# Altium PCB UWB-NODEV1.PcbDoc
Units mil, origin at the board's own origin, x right, y up, seen from the top; angles counter-clockwise.
Board outline 1660 x 2519.68 mil, 2 copper layers (Top Layer, Bottom Layer); 46 components, 62 nets, 194 pads, 22 vias.
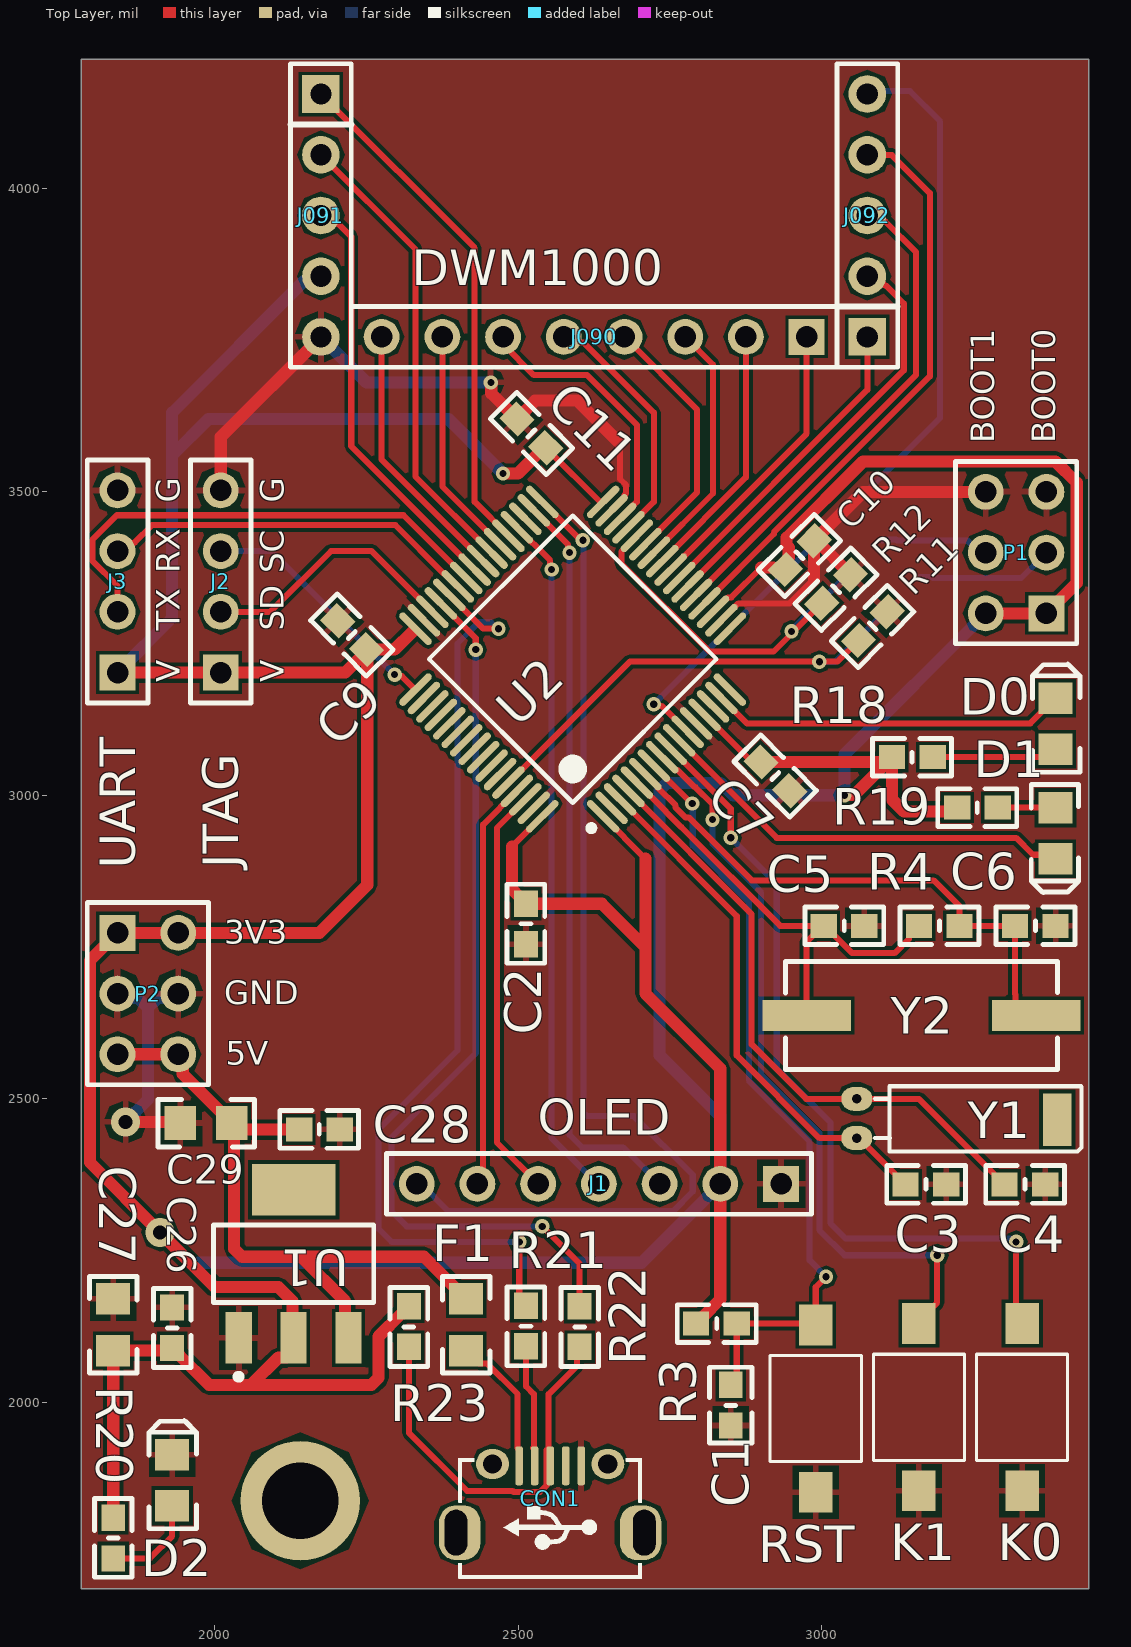
[diagram p0: Top Layer view]
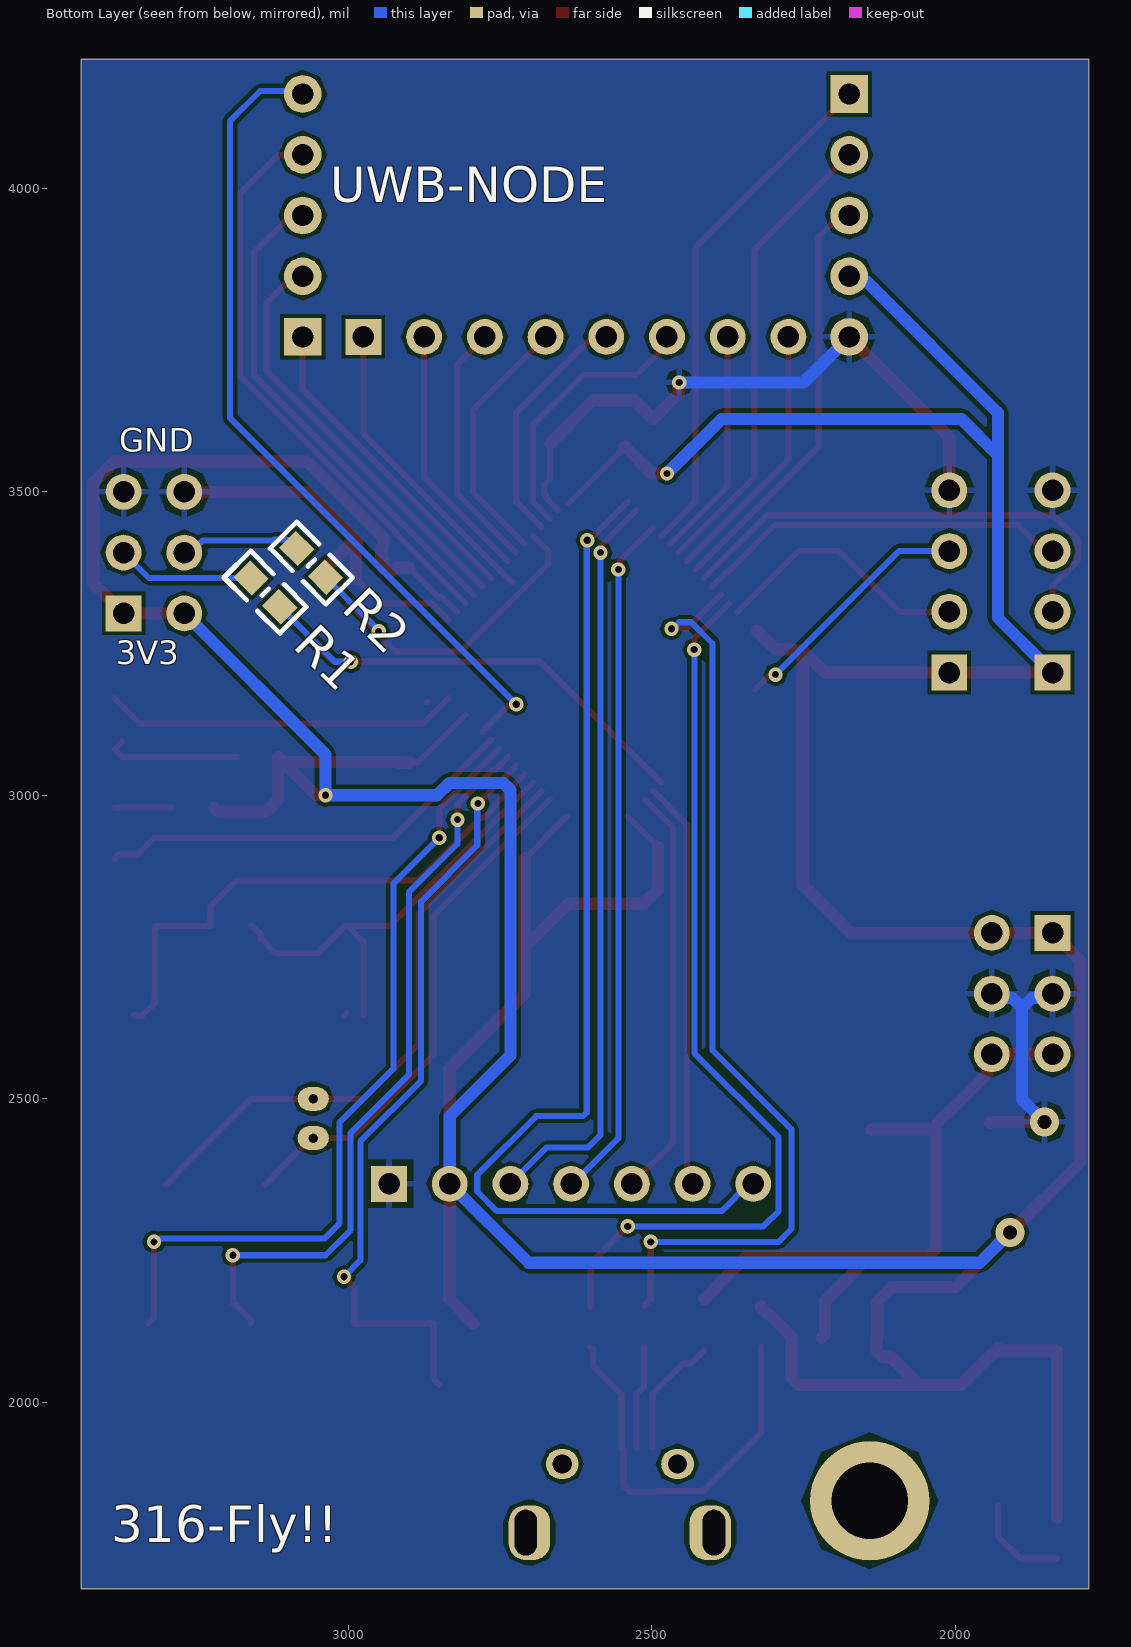
[diagram p1: Bottom Layer view, seen from below]

## Layer stack, top to bottom
Top Solder: solder mask 0.4, Solder Resist, Dk 3.5
Top Layer: signal copper 1.4
Dielectric 1: dielectric 12.6, FR-4, Dk 4.8
Bottom Layer: signal copper 1.4
Bottom Solder: solder mask 0.4, Solder Resist, Dk 3.5

## Board outline
1780,1692.91 1780,4212.6 3440,4212.6 3440,1692.91

## Design rules (kind name [scope] priority, off if disabled: settings)
Clearance [All] p1: gap=6 ignorepadtopadclearanceinfootprint=TRUE
HoleSize [All] p1: absolutevalues=TRUE maxlimit=23.62 minlimit=11.81 maxpercent=80.000 minpercent=20.000
PolygonConnect [All] p1: connectstyle=Relief reliefconductorwidth=10 reliefentries=4 polygonreliefangle="90 Angle" airgapwidth=10
RoutingVias [All] p1: holewidth=28 width=50 viastyle="Through Hole" minholewidth=28 minwidth=50 maxholewidth=28 maxwidth=50
SolderMaskExpansion [All] p1: expansion=4 istentingtop=FALSE
Width Width_VCC [InNet('VCC5')] p1: maxlimit=20 minlimit=20 preferedwidth=20
Width Width_GND [InNet('GND')] p2: maxlimit=20 minlimit=20 preferedwidth=20
Width Width_VCC3.3 [InNet('VCC3.3')] p3: maxlimit=20 minlimit=20 preferedwidth=20
Width [All] p4: maxlimit=10 minlimit=10 preferedwidth=10
29 further rules are at their usual default settings.

## Components (designator, comment, footprint, x,y, rotation, side; value= is the part's Value field where it differs from the comment)
C1 "104" 0603C 2850,1962.07 r90 top value=100pF
C2 "104" 0603J 2511.76,2753.46 r90 top
C3 "12pF" 0603J 3136.93,2360.09 r0 top value=20pF
C4 "12pF" 0603J 3300,2360.09 r0 top value=20pF
C5 "20pF" 0603J 3002.07,2786 r0 top
C6 "20pF" 0603J 3317.07,2786 r0 top
C7 "104" 0603J 2947.33,3006.26 r135 top
C9 "104" 0603J 2250,3238.59 r135 top
C10 "104" 0603J 2988.74,3419.18 r225 top
C11 "104" 0603J 2497.84,3621.38 r315 top
C26 "104" 0603J 1931,2157.5 r270 top
C27 "106" RC0805 1832.91,2085.49 r90 top
C28 "104" 0603J 2207.09,2448.7 r180 top
C29 "106" RC0805 2028.42,2460 r180 top
CON1 "MicroUSB" USB_Micro-AB 2552.63,1795.63 r180 top value="Type B"
D0 "DS0" LED0805 3390,3160 r90 top
D1 "DS1" LED0805 3380,2895.81 r270 top
D2 "PWR" LED0805 1935,1914 r90 top
F1 "500mA" RC0805 2414.32,2170.49 r270 top
J1 "Header 7" HDR1X7 2932.84,2360 r180 top
J2 "Header 4" HDR1X4 2010,3202.25 r90 top
J3 "Header 4" HDR1X4 1840,3202.25 r90 top
J090 "J1X8" HDR1X8 2975,3755 r180 top
J091 "J1X5" HDR1X5 2175,4155 r270 top
J092 "J1X5" HDR1X5 3075,3755 r90 top
K0 "SW-PB" SW-SPST 3330,1854.41 r90 top
K1 "SW-PB" SW-SPST 3160,1854.41 r90 top
P1 "Header 3X2" HDR2X3 3370,3299.69 r90 top
P2 "Header 3X2" HDR2X3 1840,2773.43 r270 top
R1 "510R" 0603J 3112.67,3309.19 r45 bottom
R2 "510R" 0603J 3084.82,3408.06 r225 bottom
R3 "10K" 0603J 2791.93,2131 r0 top
R4 "1M" 0603J 3159,2786 r0 top
R11 "10K" 0603J 3109.2,3302.25 r225 top
R12 "10K" 0603J 3048.74,3363.5 r225 top
R18 "510R" 0603J 3183.56,3061.84 r180 top
R19 "510R" 0603J 3291,2978.81 r180 top
R20 "510R" 0603J 1831.91,1742.07 r90 top
R21 "22R" 0603J 2513.76,2160.45 r270 top
R22 "22R" 0603 2601.18,2158.46 r270 top
R23 "1.5K" 0603J 2321,2159.46 r270 top
RST "" SW-SPST 2990,2127.59 r270 top (schematic designator REST)
U1 "AMS1117-3.3" SOT223 2130,2228.42 r0 top
U2 "STM32F103RCT6" LQFP64 2639.82,2965.4 r135 top
Y1 "32.768k" 32.768k 3057.61,2500.1 r270 top value=8MHz
Y2 "8MHz" smt-xtal 2977.33,2637.38 r0 top

## Footprints (in the part's own frame and the unit in brackets; to place one, negate y for a bottom-side part, rotate by r counter-clockwise, add the part's x,y. Pads: shape width x height; smd on the part's side, far side on the other; paste and mask are expansions set on the pad)
32.768k [mm]
  oval 1x1.3 hole 0.4: 1(0,0) 2(1.64,0)
  rect 2.2x1.2 smd: 3(0.875,8.382)
  silkscreen extent -0.53,0.76 2.2,9.4
0603 [mm]
  rect 1.1x1 smd: 1(1.7,0) 2(0,0)
  silkscreen extent -0.79,-0.79 2.51,0.79
0603C [mm] "for capicty only"
  rect 1.1x1 smd: 1(0,0) 2(1.7,0)
  silkscreen extent -0.74,-0.89 2.44,0.89
0603J [mm]
  rect 1.1x1 smd: 1(1.725,-0.025) 2(0.025,-0.025)
  silkscreen extent -0.76,-0.81 2.54,0.76
HDR1X4 [mm] "Connector; Header; 4 Position"
  rect 1.5x1.5 hole 0.9: 1(0,0)
  round 1.5 hole 0.9: 2(2.54,0) 3(5.08,0) 4(7.62,0)
  silkscreen extent -1.27,-1.27 8.89,1.27
HDR1X5 [mil]
  rect 62x62 hole 35: 1(0,0)
  round 62 hole 35: 2(100,0) 3(200,0) 4(300,0) 5(400,0)
  silkscreen extent -50,-50 450,50
HDR1X7 [mm] "Connector; Header; 7 Position"
  rect 1.5x1.5 hole 0.9: 1(0,0)
  round 1.5 hole 0.9: 2(2.54,0) 3(5.08,0) 4(7.62,0) 5(10.16,0) 6(12.7,0) 7(15.24,0)
  silkscreen extent -1.27,-1.27 16.51,1.27
HDR1X8 [mm] "Connector; Header; 8 Position"
  rect 1.5x1.5 hole 0.9: 1(0,0)
  round 1.5 hole 0.9: 2(2.54,0) 3(5.08,0) 4(7.62,0) 5(10.16,0) 6(12.7,0) 7(15.24,0) 8(17.78,0)
  silkscreen extent -1.27,-1.27 19.05,1.27
HDR2X3 [mm] "Connector; Header; 3x2 Position"
  rect 1.5x1.5 hole 0.9: 1(0,0)
  round 1.5 hole 0.9: 2(0,2.54) 3(2.54,0) 4(2.54,2.54) 5(5.08,0) 6(5.08,2.54)
  silkscreen extent -1.27,-1.27 6.35,3.81
LED0805 [mil]
  rect 52x56 smd: 1(-84,5) 2(0,5)
  silkscreen extent -122,-35 56,43
LQFP64 [mm] "SOT-223/SC-73; 4 Leads; Body 6.7 x 7.3 mm, inc. leads (LxW max)"
  oval 1.8x0.3 smd: 1(0,0) 2(0,-0.5) 3(0,-1) 4(0,-1.5) 5(0,-2) 6(0,-2.5) 7(0,-3) 8(0,-3.5) 9(0,-4) 10(0,-4.5) 11(0,-5) 12(0,-5.5) 13(0,-6) 14(0,-6.5) 15(0,-7) 16(0,-7.5) 33(11.1,-7.5) 34(11.1,-7) 35(11.1,-6.5) 36(11.1,-6) 37(11.1,-5.5) 38(11.1,-5) 39(11.1,-4.5) 40(11.1,-4) 41(11.1,-3.5) 42(11.1,-3) 43(11.1,-2.5) 44(11.1,-2) 45(11.1,-1.5) 46(11.1,-1) 47(11.1,-0.5) 48(11.1,0)
  oval 0.3x1.8 smd: 17(1.8,-9.3) 18(2.3,-9.3) 19(2.8,-9.3) 20(3.3,-9.3) 21(3.8,-9.3) 22(4.3,-9.3) 23(4.8,-9.3) 24(5.3,-9.3) 25(5.8,-9.3) 26(6.3,-9.3) 27(6.8,-9.3) 28(7.3,-9.3) 29(7.8,-9.3) 30(8.3,-9.3) 31(8.8,-9.3) 32(9.3,-9.3) 49(9.3,1.8) 50(8.8,1.8) 51(8.3,1.8) 52(7.8,1.8) 53(7.3,1.8) 54(6.8,1.8) 55(6.3,1.8) 56(5.8,1.8) 57(5.3,1.8) 58(4.8,1.8) 59(4.3,1.8) 60(3.8,1.8) 61(3.3,1.8) 62(2.8,1.8) 63(2.3,1.8) 64(1.8,1.8)
  silkscreen extent -0.12,-8 9.8,0.82, body extent 0.55,-8.75 10.55,1.25, height 1.6
RC0805 [mil]
  rect 52x56 smd: 1(0,0) 2(85,0)
  silkscreen extent -37,-39 122,39
smt-xtal [mil]
  rect 146x51 smd: 1(-2,0) 2(376,0)
  silkscreen extent -37,-89 411,89
SOT223 [mm] "SOT-223/SC-73; 4 Leads; Body 6.7 x 7.3 mm, inc. leads (LxW max)"
  rect 1.1x2.15 smd: 1(-2.3,-3.1) 2(0,-3.1) 3(2.3,-3.1)
  rect 3.5x2.15 smd: 4(0,3.1)
  silkscreen extent -3.35,-4.85 3.35,1.63
SW-SPST [mm]
  rect 1.7x1.4 smd: 1(0,0) 2(7,0)
  silkscreen extent 1.27,-1.91 5.71,1.91
USB_Micro-AB [mil]
  rrect80% 68x90 hole 37 slot 75 at 90 deg copper offset 6,0 mask+0: 0(-155,10)
  oval 54x50 hole 32 mask+0: 0(-95,-103) 0(95,-103)
  rrect80% 68x90 hole 37 slot 75 at 90 deg copper offset -6,0 mask+0: 0(155,10)
  rrect50% 12x64 smd: 1(51.18,-100) 2(25.59,-100) 3(0,-100) 4(-25.59,-100) 5(-51.18,-100)
  silkscreen extent -150,-113 150,86, body extent -161,-109 161,104, height 108

## Part data
C1: library part CAP, "GRM39 X7R102K50PT", Published=8-Jun-2000, Publisher="Altium Limited", REF="GRM39 X7R102K50PT", Revision="July-2002: Re-released for DXP Platform."
C2 C7 C9 C10 C11: library part CAP
C3 C4 C5 C6: library part CAP, "CAP CHIP 20P 50V(+-5% C0G 0603)"
C26: library part Cap, "Capacitor", LatestRevisionDate=17-Jul-2002, LatestRevisionNote="Re-released for DXP Platform.", PackageReference=RAD-0.3, Published=8-Jun-2000, Publisher="Altium Limited"
C27 C29: library part "CAPACITOR POL", "Capacitor"
C28: library part CAP, "Capacitor"
CON1: library part USB_Micro, "USB"
D0 D1 D2: library part LED
F1 R1 R2 R3 R4 R11 R12 R18 R19 R20 R21 R22 R23: library part RES
J1: "Header, 7-Pin", LatestRevisionDate=17-Jul-2002, LatestRevisionNote="Re-released for DXP Platform.", Publisher="Altium Limited"
J2 J3: "Header, 4-Pin", LatestRevisionDate=17-Jul-2002, LatestRevisionNote="Re-released for DXP Platform.", Publisher="Altium Limited"
P1 P2: "Header, 3-Pin, Dual row", LatestRevisionDate=17-Jul-2002, LatestRevisionNote="Re-released for DXP Platform.", Publisher="Altium Limited"
RST: library part SW-PB
U1: library part LT1085CM-3.3
U2: library part STM32F103RBT6
Y1 Y2: library part CRYSTAL, "Crystal 8MHz PLUG"

## Free pads (board coordinates)
  round 196.85 hole 125.98: ""(2141,1838)

## Via types
v1: diameter 23.62, hole 11.81, Top Layer to Bottom Layer, 20 vias
v2: diameter 47.24, hole 23.62, Top Layer to Bottom Layer, 2 vias

## Nets (pads, with @x,y where several pads share a name; then routed paths per layer and width w, separated by ;. In a path a pad name is that pad's centre, name@x,y a point inside that pad or via, vN(x,y) a via of type N, cw(c..) or ccw(c..) an arc to the next point about the centre after c; other vN are vias at no path point)
BOOT0: R1.2 R11.1 U2.60 | length 827.6
  Top Layer w10: U2.60 2484.41,3021.08 2506.19,3042.87 2506.45,3042.87 2684.21,3220.63 3026.16,3220.63 R11.1
  Bottom Layer w10: v1(2996,3220) 3022.07,3220 R1.2
BOOT1: R2.1 R12.1 U2.28 | length 604.9
  Top Layer w10: U2.28 2695.49,3427.04 2670,3401.54 2670,3381.85 2815.22,3236.63 2920.46,3236.63 R12.1
  Bottom Layer w10: v1(2950,3270) 2950,3271.83 R2.1
CS: J1.7 U2.33 | length 1772.3
  Top Layer w10: U2.33 2602.8,3420 v1(2606.4,3420)
  Bottom Layer w10: J1.7 2340,2360 2384.85,2315.15 2755.15,2315.15 2787.45,2347.45 2787.45,2374.72 2690.5,2471.67 2613.33,2471.67 2607.2,2477.8 2607.2,3419.2 v1(2606.4,3420)
DC: J1.6 U2.61 | length 674.1
  Top Layer w10: J1.6 2442.16,2369.32 2442.16,2951.48 U2.61
EXT: J091.1 U2.37 | length 855.4
  Top Layer w10: J091.1 2428.24,3901.76 2428.24,3483.21 U2.37
GND: C1.1 C2.2 C3.1 C4.1 C5.1 C6.1 C7.2 C9.1 C10.2 C11.2 C26.2 C27.2 C28.2 C29.2 CON1.5 D2.2 J1.1 J2.4 J3.4 J091.5 K0.1 K1.1 P1.5 P1.6 P2.3 P2.4 R11.2 R12.2 RST.2 U1.1 U2.12 U2.18 U2.31 U2.47 U2.63 | length 2103.3
  Top Layer w10: U2.31@2653.74,3468.8 U2.31 2674.96,3490.51 2674.96,3494.44 2677.6,3497.08 2677.6,3511.09 2667.66,3521.03 2667.66,3579.55 ; U2.18 2862.53,3316.17 2946.76,3316.17 2987.33,3356.74
  Top Layer w20: v2(1853.27,2462) 1941.42,2462 C29.2 ; J2.4 2010,3590 J091.5 ; v1(2454.89,3680) 2455.59,3679.31 2455.59,3662.22 C11.2 2527.88,3650 2597.21,3650 2667.66,3579.55 ; 2987.33,3356.74 2987.33,3402.7 2985.93,3404.09 2985.93,3417.78 C10.2 ; R12.2 2991.65,3419.18 C10.2 ; P1.6 3067.84,3499.69 C10.2
  Bottom Layer w20: P2.3 1847.47,2665.95 1874.05,2665.95 1890,2650 ; v2(1853.27,2462) 1890,2498.73 1890,2650 ; P2.4 1932.53,2665.95 1905.95,2665.95 1890,2650 ; J091.5 2250,3680 v1(2454.89,3680)
IO0: J090.1 U2.24 | length 506.1
  Top Layer w10: U2.24@2729.46,3351.32 2730.64,3351.32 U2.24 2975,3595.68 J090.1
IO1: J090.2 U2.25 | length 426.3
  Top Layer w10: U2.25 2875,3523.52 J090.2
IO2: J090.3 U2.26 | length 414.6
  Top Layer w10: U2.26 2820.77,3497.12 2820.77,3709.23 J090.3
IO3: J090.4 U2.27 | length 426
  Top Layer w10: J090.4 2794.37,3635.63 2794.37,3498.56 U2.27
IO4: J090.5 U2.29 | length 406.2
  Top Layer w10: J090.5 2584.39,3745.61 2608.12,3745.61 2723.33,3630.4 2723.33,3483.21 U2.29
IO5: J090.6 U2.30 | length 453.8
  Top Layer w10: J090.6 2475,3742.84 2525.68,3692.16 2613.33,3692.16 2695.49,3610 2695.49,3483.21 U2.30
IO6: J090.7 U2.38 | length 380.7
  Top Layer w10: J090.7 2375,3508.61 U2.38
IO7: J090.8 U2.40 | length 438.5
  Top Layer w10: J090.8 2275,3552.93 U2.40
IRQ: J092.5 U2.11 | length 1372.6
  Top Layer w10: v1(2723.33,3150) 2725.94,3147.39 2736.21,3147.39 U2.11
  Bottom Layer w10: v1(2723.33,3150) 3195,3621.67 3195,4110 3145,4160 3080,4160 J092.5
KEY0: K0.2 U2.9 | length 1347.6
  Top Layer w10: U2.9 2850,2977.93 v1(2850,2930) ; v1(3320,2264.43) 3320,2140 K0.2
  Bottom Layer w10: v1(2850,2930) 2925.77,2854.23 2925.77,2549.66 3014.13,2461.3 3014.13,2295.35 3039.48,2270 3310.74,2270 3316.31,2264.43 v1(3320,2264.43)
KEY1: K1.2 U2.8 | length 1226.1
  Top Layer w10: U2.8 2758.48,3041.61 2762.41,3041.61 2790.56,3013.46 2791.85,3013.46 2820,2985.3 v1(2820,2960) ; K1.2 3160,2135.91 3182.56,2158.46 3184.14,2158.46 3190,2164.32 v1(3190,2242.47)
  Bottom Layer w10: v1(2820,2960) 2820,2920 2900,2840 2900,2540 2996,2444 2996,2283.96 3037.49,2242.47 v1(3190,2242.47)
LED0: D0.2 U2.15 | length 584.8
  Top Layer w10: U2.15 2876.45,3118.52 3343.52,3118.52 D0.2
LED1: D1.2 U2.10 | length 700.6
  Top Layer w10: U2.10 2925.77,2930 3320,2930 3347.86,2902.14 3378.66,2902.14 D1.2
NetCON1_1: CON1.1 F1.2 | length 203.5
  Top Layer w10: F1.2 2435.32,2064.49 2448.43,2064.49 2498.82,2014.1 CON1.1@2498.82,1924.68
NetCON1_2: CON1.2 R21.1 | length 173.7
  Top Layer w10: R21.1 2512.76,2026.62 2525.68,2013.7 2525.68,1925.95 CON1.2@2524.41,1924.68
NetCON1_3: CON1.3 R22.1 R23.1 | length 663.7
  Top Layer w10: R23.1 2320,1950 2415.59,1854.41 2490.87,1854.41 2492.65,1852.63 2535.84,1852.63 2546.97,1863.76 2546.97,1921.65 2550,1924.68 2550,2013.7 2597.04,2060.74 2597.04,2087.39 R22.1
NetD0_1: D0.1 R18.2 | length 225.6
  Top Layer w10: R18.2 3371.84,3062.84 D0.1 D0.1@3372.5,3088.5
NetD1_1: D1.1 R19.2 | length 95
  Top Layer w10: R19.2 D1.1
NetD2_1: D2.1 R20.2 | length 162.4
  Top Layer w10: R20.2 1893.07,1743.07 1930,1780 D2.1
NetP1_3: P1.3 R1.1 | length 228.4
  Bottom Layer w10: R1.1 3161.39,3359.32 3182.16,3359.32 3183.55,3357.93 3328.24,3357.93 P1.3
NetP1_4: P1.4 R2.2 | length 179.6
  Bottom Layer w10: R2.2@3100,3420 3101.39,3421.39 3122.16,3421.39 3123.55,3420 3239.61,3420 3259.93,3399.69 P1.4
OSC_IN1: C3.2 U2.3 Y1.2 | length 868.4
  Top Layer w10: U2.3 2859.86,2801.04 2859.86,2571.8 2996.13,2435.53 Y1.2 3061.49,2435.53 3121.28,2375.75 3121.28,2373.78 3135.96,2359.09 C3.2
OSC_IN2: C5.2 R4.2 U2.5 Y2.1 | length 767.9
  Top Layer w10: U2.5 2743.11,2973.46 2743.11,2973.23 2768.63,2947.71 2768.86,2947.71 2931.58,2785 C5.2@3001.1,2785 ; Y2.1 2975,2637.71 2975,2758.9 2986.42,2770.31 C5.2@3001.1,2785 ; Y2.1@3003.07,2641.31 Y2.1@3007,2637.38 ; R4.2 3158.03,2785 3143.35,2770.31 3143.35,2763.35 3120,2740 3050.04,2740 3005.04,2785 C5.2@3001.1,2785
OSC_OUT1: C4.2 U2.4 Y1.1 | length 1014.6
  Top Layer w10: U2.4 2884.41,2804.32 2884.41,2590 2974.31,2500.1 Y1.1 3159.99,2500.1 3284.35,2375.75 3284.35,2373.78 3299.03,2359.09 C4.2
OSC_OUT2: C6.2 R4.1 U2.6 Y2.2 | length 904.8
  Top Layer w10: U2.6 2730.64,3013.77 2730.64,3011.96 2759.11,2983.49 2759.11,2979.86 2775.26,2963.71 2780.7,2963.71 2884.41,2860 3184.14,2860 3226.93,2817.21 R4.1 C6.2 3318.07,2672.64 3318.68,2672.02 3318.68,2657.88 3339.18,2637.38 Y2.2
PA0: U2.14
PA2: U2.16 | length 1.2
  Top Layer w10: U2.16@2869.14,3153.66 U2.16@2870.32,3153.66
PA3: U2.17 | length 1.2
  Top Layer w10: U2.17@2858.66,3284.46 U2.17@2859.84,3284.46
PA11: R21.2 U2.44 | length 1558.8
  Top Layer w10: U2.44 2442.16,3274.41 v1(2467.56,3274.41) ; v1(2501.72,2264.43) 2501.72,2170.49 R21.2
  Bottom Layer w10: v1(2467.56,3274.41) 2465.48,3274.41 2454.89,3285 2435,3285 2400,3250 2400,2580 2270,2450 2270,2285.67 2291.24,2264.43 v1(2501.72,2264.43)
PA12: R22.2 U2.45 | length 1498.1
  Top Layer w10: U2.45 2430,3258.74 v1(2430,3240) ; v1(2539.6,2290) 2601.18,2228.42 R22.2
  Bottom Layer w10: v1(2430,3240) 2430,2575.24 2291.24,2436.48 2291.24,2315.15 2316.39,2290 v1(2539.6,2290)
PA13: J2.2 U2.46 | length 431.5
  Top Layer w10: J2.2 2091.64,3302.25 2191.64,3402.25 2258.64,3402.25 U2.46
PA14: J2.3 U2.49 | length 414.8
  Top Layer w10: v1(2296.39,3198.79) 2299,3196.18 2308.33,3196.18 U2.49@2330.32,3174.19
  Bottom Layer w10: J2.3 2092.93,3402.25 v1(2296.39,3198.79)
PA15: U2.50
PB3: U2.55
PB4: U2.56
PB5: U2.57
PB6: U2.58
PB7: U2.59
PC10: U2.51
PC11: U2.52
PC12: U2.53
PD2: U2.54
RESET: C1.2 R3.1 RST.1 U2.7 | length 1279.8
  Top Layer w10: U2.7 2785.73,2986.52 v1(2786.52,2986.52) ; C1.2 2859.86,2038.86 R3.1 2990,2130 2990,2189.93 v1(3007,2206.93)
  Bottom Layer w10: v1(2786.52,2986.52) 2787.45,2985.59 2787.45,2917.55 2880,2825 2880,2530 2980,2430 2980,2233.93 v1@3007.45,2206.48
RSET: J1.5 U2.62 | length 680.7
  Top Layer w10: U2.62 2465,2946.48 2465,2832.67 2465,2427.84 J1.5
RST': J091.3 U2.41 | length 696.8
  Top Layer w10: J091.3 2189.07,3955 2204.1,3939.97 2205.03,3939.97 2225,3920 2225,3575.09 U2.41
RXD: J3.3 U2.43 | length 620.1
  Top Layer w10: J3.3 1853.27,3402.25 1867.72,3416.7 1868.52,3416.7 1897.04,3445.22 2297.63,3445.22 2377.62,3365.24 2379.18,3365.24 U2.43
SCK: J1.3 U2.34 | length 1234.8
  Top Layer w10: U2.34 2581.78,3413.18 2581.78,3402.3 v1(2584.39,3399.69)
  Bottom Layer w10: v1(2584.39,3399.69) 2584.39,2440.61 2605,2420 2672.84,2420 J1.3
SDA: J1.4 U2.36 | length 1138.9
  Top Layer w10: U2.36 2552.39,3386.89 2552.39,3374.46 v1(2555,3371.85)
  Bottom Layer w10: v1(2555,3371.85) 2555,2435.24 2630.24,2360 J1.4
SPI1_CS: J092.4 U2.20 | length 958.6
  Top Layer w10: U2.20 2921.1,3430.42 2921.1,3433.11 3178.11,3690.12 3178.11,3991.58 3115.14,4054.55 3075.45,4054.55 J092.4
SPI1_MISO: J092.2 U2.22 | length 692.1
  Top Layer w10: U2.22 3135,3700 3135,3810 3105.03,3839.97 3104.1,3839.97 3089.07,3855 J092.2
SPI1_MOSI: J092.1 U2.23 | length 525.4
  Top Layer w10: U2.23 3075,3667.84 J092.1
SPI1_SCK: J092.3 U2.21 | length 819.7
  Top Layer w10: U2.21 3155,3692.16 3155,3895 3104.95,3945.05 3084.95,3945.05 J092.3
TXD: J3.2 U2.42 | length 811
  Top Layer w10: J3.2 1840,3344.94 1798.61,3386.32 1798.61,3420.84 1838.99,3461.22 2311.03,3461.22 U2.42
VCC3.3: C2.1 C7.1 C9.2 C10.1 C11.1 C26.1 C27.1 J1.2 J2.1 J3.1 J091.4 P1.1 P1.2 P2.1 P2.2 R3.2 R18.1 R19.1 R20.1 R23.2 U1.2 U2.1 U2.13 U2.19 U2.32 U2.48 U2.64 | length 10294.2
  Top Layer w10: 2490,2915.81 U2.64 ; C11.1 U2.32@2637.21,3480.6 ; U2.1 2709.41,2895.81 ; U2.13@2806.85,3132.44 2884.29,3055 C7.1 ; U2.19 2821.26,3302.25 2843.04,3324.04 2843.83,3324.04 2845.92,3326.12 2850.9,3326.12 2900,3375.22
  Top Layer w20: R20.1 C27.1 1925.92,2085.49 C26.1 1930,2087.6 1939.69,2077.91 1941.65,2077.91 1990.57,2029 2060,2029 ; J3.1 J2.1 2215.04,3202.25 C9.2@2251.39,3238.61 ; R23.2 2320,2156.5 2310.31,2146.81 2308.35,2146.81 2270,2108.46 2270,2040.72 2258.28,2029 2060,2029 ; 2326.63,3270.24 2296.39,3240 2266.48,3240 2265.09,3238.61 C9.2@2251.39,3238.61 ; v1(2475,3530) 2499.74,3530 2543.77,3574.03 C11.1 ; 2490,2915.81 2490,2844.76 2501.72,2833.04 2503.07,2833.04 2512.76,2823.36 C2.1 2637.71,2821.39 2709.41,2749.69 ; 2709.41,2895.81 2709.41,2749.69 ; R3.2 2794.9,2130 2804.58,2139.69 2804.58,2141.65 2832.84,2169.91 J1.2 2832.84,2550 2709.41,2673.43 2709.41,2749.69 ; C7.1 2901.39,3053.61 2915.09,3053.61 2916.48,3055 R18.1@3105.82,3055 ; 2900,3375.22 2920.15,3375.22 C10.1@2924.91,3370.46 ; C10.1@2941.39,3373.24 C10.1 2940,3385.55 2945.57,3391.11 2945.57,3407.68 2942.1,3411.16 2942.1,3424.41 3067.68,3550 3385,3550 3420,3515 3420,3349.69 P1.1 P1.2 ; v1(3037.49,3000) 3038.19,3000.69 3053.48,3000.69 3103.98,3051.19 3103.98,3053.15 R18.1@3105.82,3055 ; R19.1@3221.1,2979.81 3214.76,2973.46 3135.41,2973.46 3115.63,2993.24 R18.1 3107.79,3055 R18.1@3105.82,3055 ; 2060,2029 2105.05,2074.05 2118.35,2074.05 2130,2085.7 U1.2 2128,2108.37 2128,2166.98 2105.05,2189.93 2000.07,2189.93 v2(1910,2280) 1794.47,2395.53 1794.47,2727.9 P2.1 P2.2 2172.59,2773.43 2251.39,2852.23 C9.2@2251.39,3238.61
  Bottom Layer w20: J3.1 1930,3292.25 1930,3560 ; v2(1910,2280) 1960,2230 2702.84,2230 J1.2 2832.84,2471.67 2732.84,2571.67 2732.84,3008.6 2744.56,3020.32 2833.39,3020.32 2853.7,3000 v1(3037.49,3000) 3037.49,3067.18 P1.2 ; J091.4 2166.96,3846.96 2146.96,3846.96 1930,3630 1930,3560 ; v1(2475,3530) 2385,3620 1990,3620 1930,3560
VCC5: C28.1 C29.1 F1.1 P2.5 P2.6 U1.3 | length 1138.9
  Top Layer w20: P2.5 P2.6 1947.47,2565.95 1947.47,2540.95 2010.42,2478 2012.42,2478 2028.42,2462 C29.1 ; C28.1 2138.85,2449.38 2032,2449.38 2032,2253 2045,2240 2141.65,2240 ; U1.3 2214.72,2112.2 2214.72,2166.94 2141.65,2240 ; F1.1 2412.32,2170.49 2396.32,2186.49 2396.32,2188.49 2344.81,2240 2141.65,2240
WAKE: J091.2 U2.39 | length 771.7
  Top Layer w10: J091.2 2330.81,3899.19 2330.81,3524.96 U2.39
pads on no net: CON1.0 CON1.4 U1.4 U2.2 U2.35 Y1.3

## Polygon pours and split planes (outlines as drawn)
GND on Bottom Layer "GND_L02_P001" (solid, pour order 1): 1780,4212.6 1780,1692.91 3440,1692.91 3440,4212.6
GND on Top Layer "GND_L01_P000" (solid, pour order 0): 1780,4212.6 1780,1692.91 3440,1692.91 3440,4212.6

## Silkscreen, mask and mechanical layers (free items; w line width, h text height)
Top Overlay:
  text "DWM1000" at 2325,3820 h100
  text "BOOT1" at 3284.09,3579.93 h39.37 r90
  text "BOOT0" at 3384.09,3579.93 h39.37 r90
  text "G" at 1942.28,3481.81 h39.37 r90
  text "G" at 2114.09,3481.81 h39.37 r90
  text "RX" at 1942.28,3365.91 h39.37 r90
  text "SC" at 2114.09,3365.91 h39.37 r90
  text "TX" at 1942.28,3271.41 h39.37 r90
  text "SD" at 2114.09,3271.41 h39.37 r90
  text "V" at 1942.28,3185.91 h39.37 r90
  text "V" at 2114.09,3185.91 h39.37 r90
  text "JTAG" at 2058.66,2879.72 h100 r90
  text "UART" at 1888.66,2879.21 h100 r90
  text "3V3" at 2015.91,2755.91 h39.37
  text "GND" at 2015.91,2655.91 h39.37
  text "5V" at 2018.33,2555.91 h39.37
  text "OLED" at 2532.05,2421.34 h100
Bottom Overlay:
  text "UWB-NODE" at 3030,3956.79 h100
  text "GND" at 3376.77,3565.91 h39.37
  text "3V3" at 3382.67,3215.91 h39.37
  text "316-Fly!!" at 3390,1769.99 h60
Mechanical 1:
  the board outline again, w10